# Altium PCB MainDesign.PcbDoc
Units mm, origin at the board's own origin, x right, y up, seen from the top; angles counter-clockwise.
Board outline 36.13 x 26.92 mm, 2 copper layers (Top Layer, Bottom Layer); 53 components, 45 nets, 227 pads, 84 vias.
Unrouted connection lines stored in the file: 1.
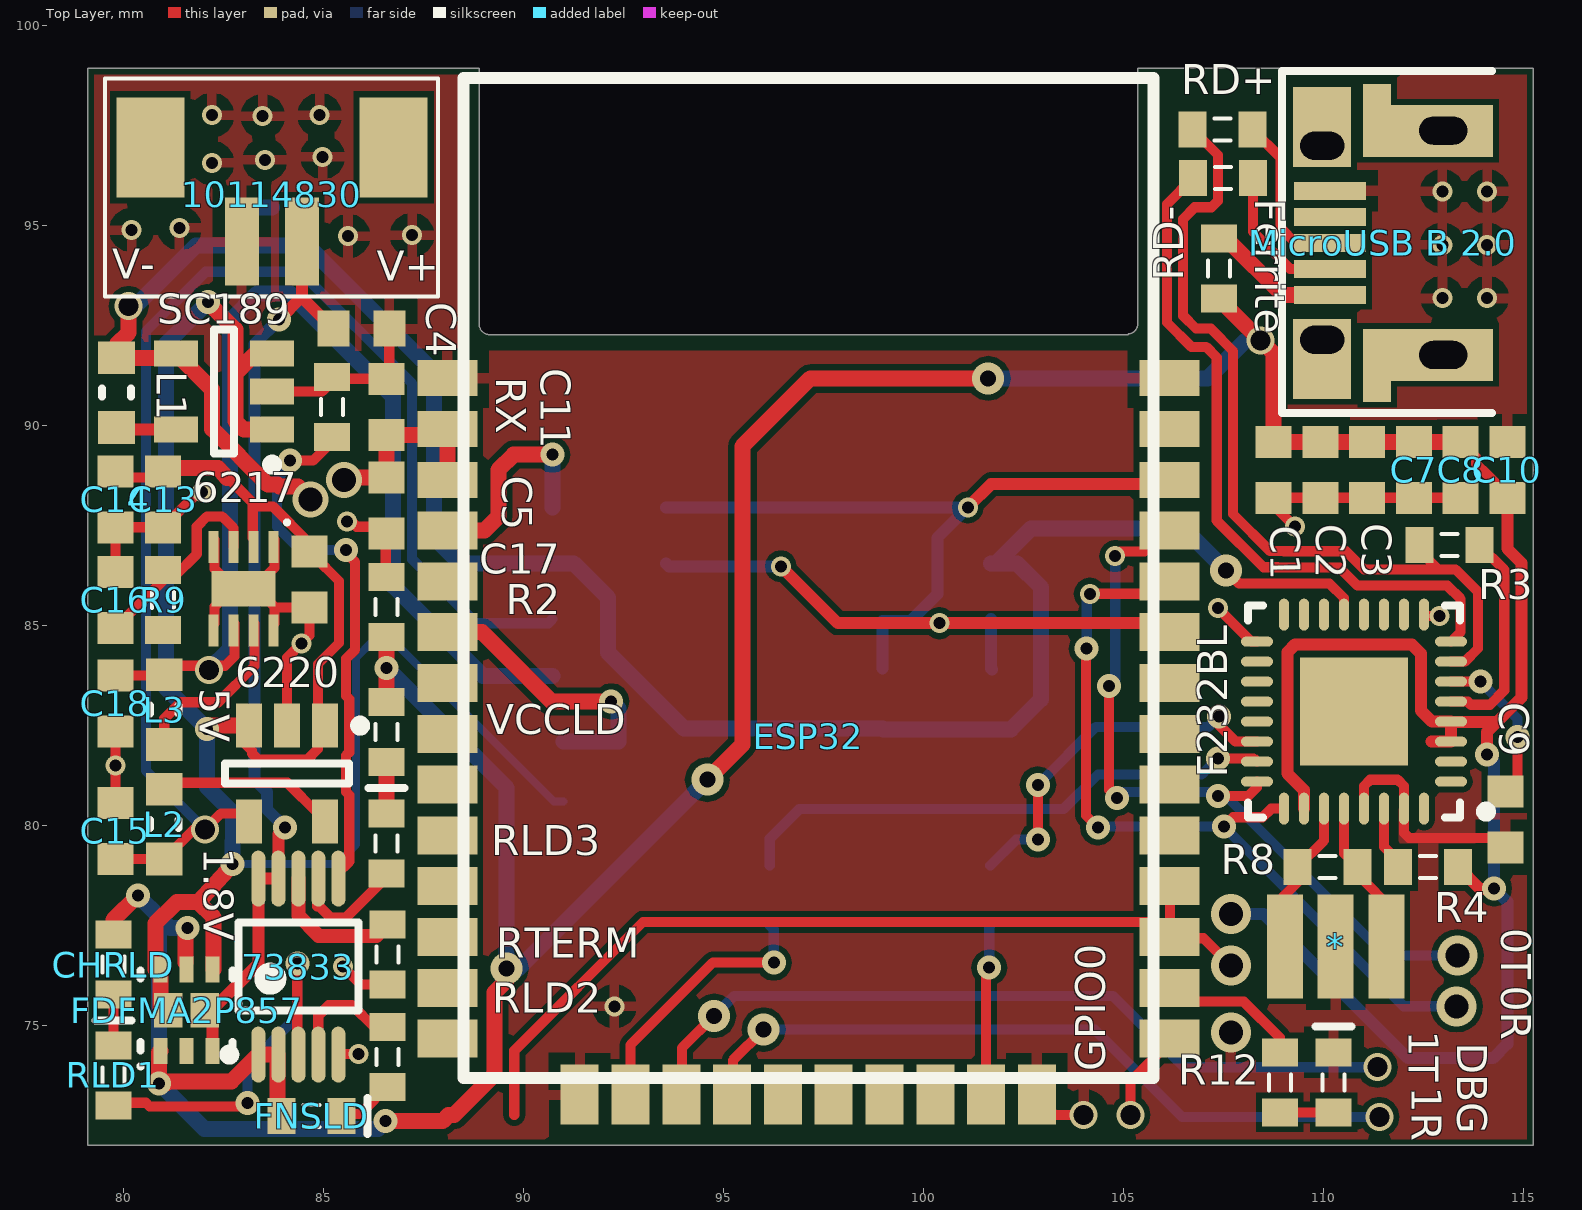
[diagram p0: Top Layer view]
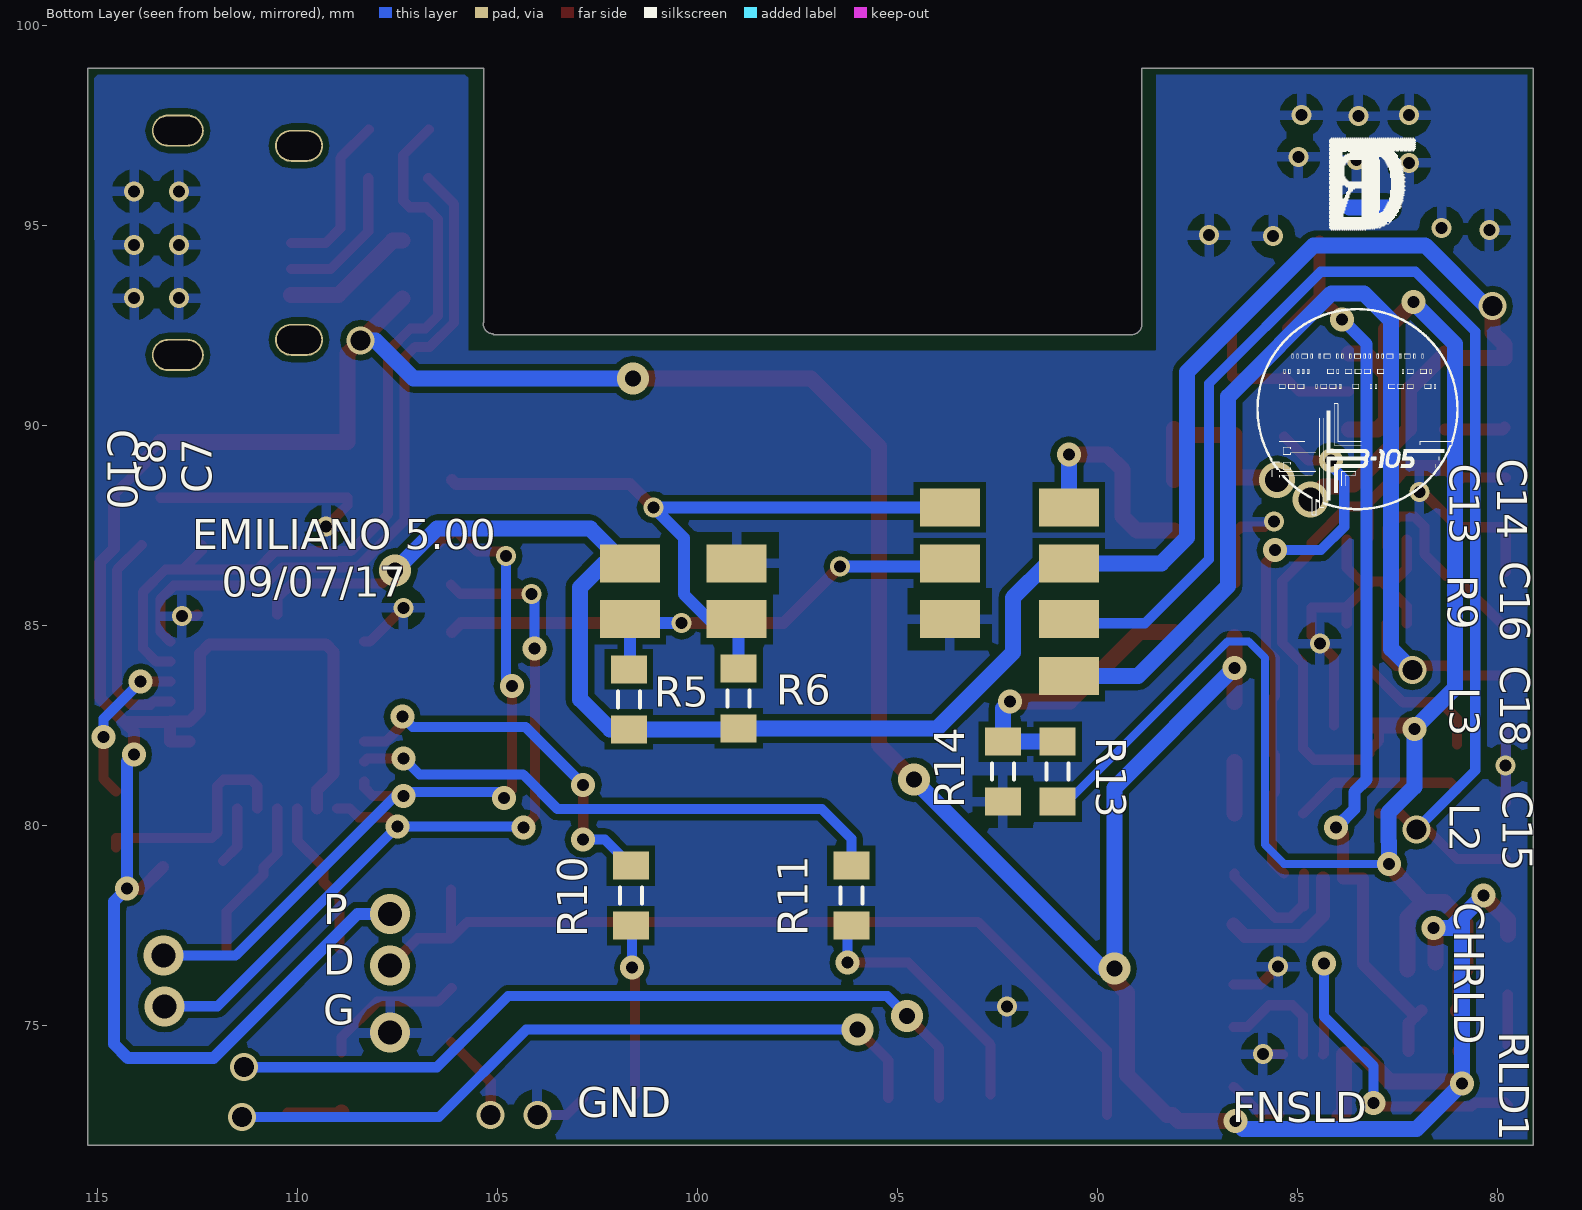
[diagram p1: Bottom Layer view, seen from below]
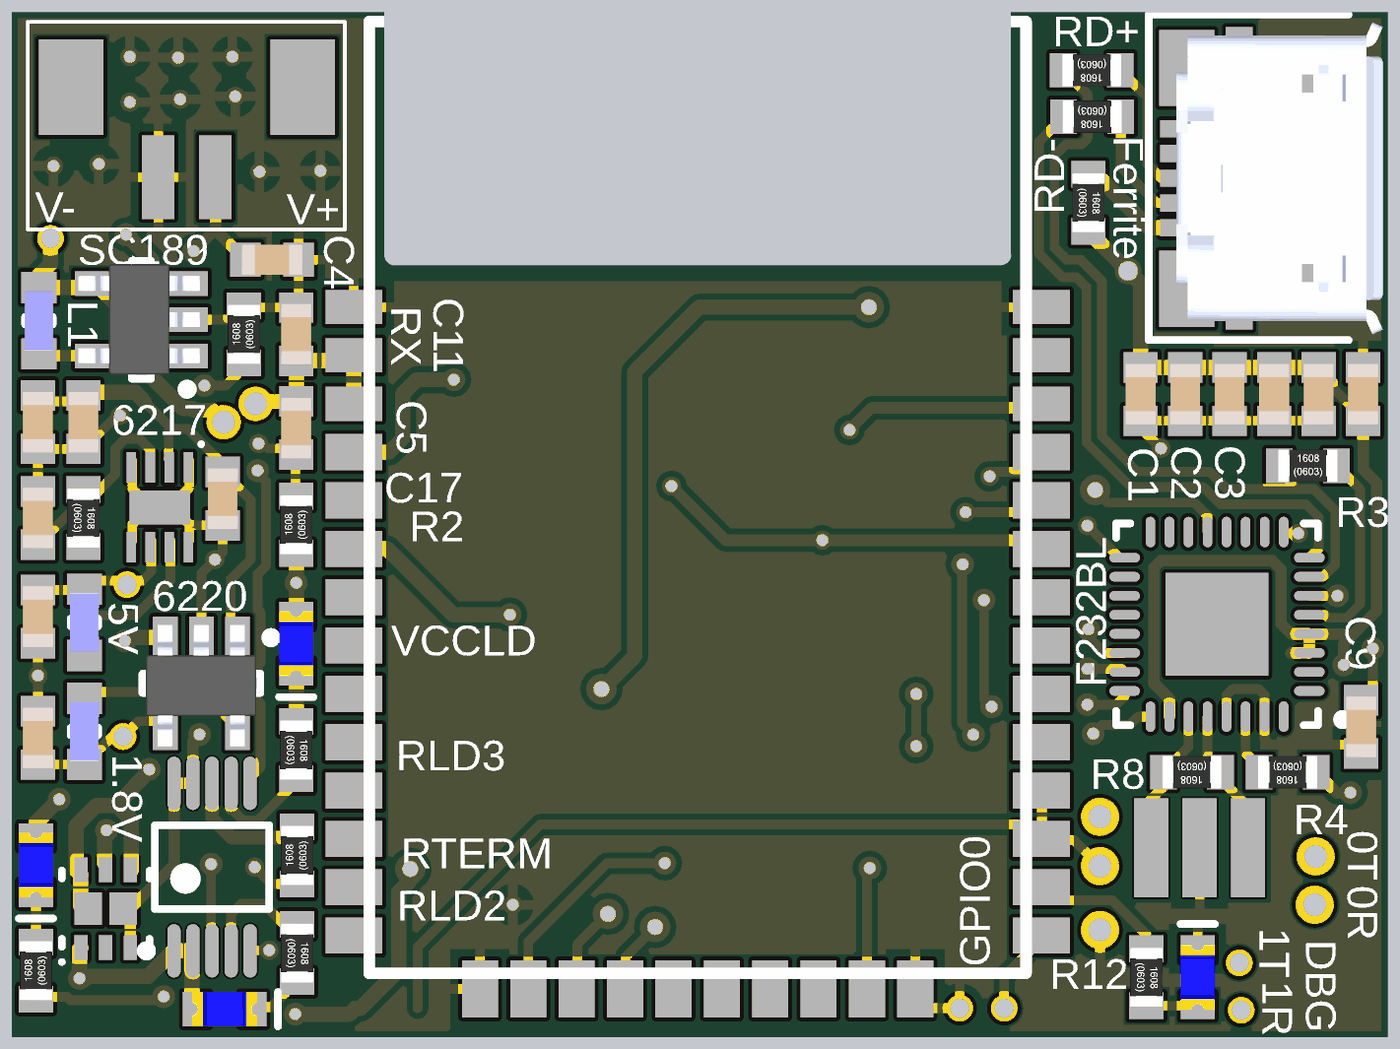
[diagram p2: 3D render of the assembled board from above, using the file's embedded part models]
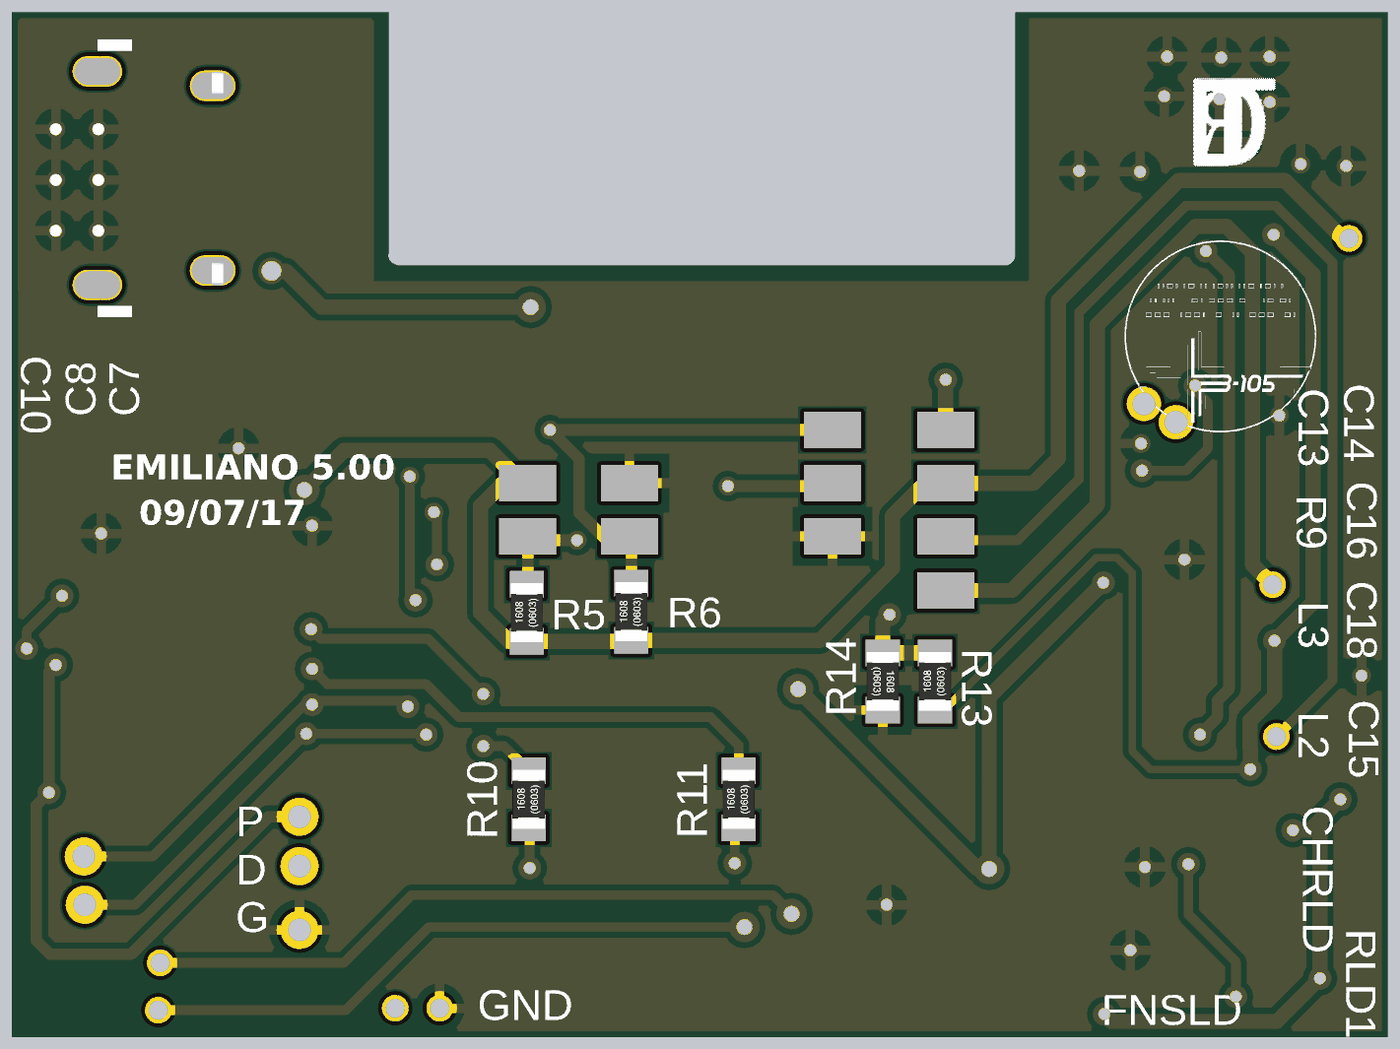
[diagram p3: 3D render of the assembled board from below, using the file's embedded part models]

## Layer stack, top to bottom
Top Solder: solder mask 0.0102, Solder Resist, Dk 3.5
Top Layer: signal copper 0.0356
Dielectric 1: dielectric 0.32, FR-4, Dk 4.8
Bottom Layer: signal copper 0.0356
Bottom Solder: solder mask 0.0102, Solder Resist, Dk 3.5

## Board outline
79.121,72.009 79.121,98.933 88.9,98.933 88.9,92.548 ccw(c89.173,92.548) 89.173,92.276 105.124,92.281 105.124,92.295 ccw(c105.105,92.558) 105.368,92.575 105.359,92.575 105.359,98.933 115.25,98.933 115.25,72.009

## Design rules (kind name [scope] priority, off if disabled: settings)
Clearance [All] p1: gap=0.15 ignorepadtopadclearanceinfootprint=FALSE except(0: Arc-Hole Track-Hole SMDPad-Hole THPad-Hole Via-Hole Fill-Hole Poly-Hole Region-Hole Text-Hole)
HoleSize [All] p1: absolutevalues=TRUE maxlimit=6.3 minlimit=0.3 maxpercent=80.000 minpercent=20.000
PolygonConnect [All] p1: connectstyle=Relief reliefconductorwidth=0.25 reliefentries=4 polygonreliefangle="90 Angle" airgapwidth=0.3
RoutingVias [All] p1: holewidth=0.3 width=0.6 viastyle="Through Hole" minholewidth=0.3 minwidth=0.6 maxholewidth=6.3 maxwidth=10.6
SilkToSilkClearance [All] p1 off: silktosilkclearance=0.254
SolderMaskExpansion [All] p1: expansion=0.102
Width Width_V+ [InNet('Net1603_1')] p1: maxlimit=0.5 minlimit=0.254 preferedwidth=0.4
Width Width_5V [InNet('Net73833_1')] p2: maxlimit=0.5 minlimit=0.254 preferedwidth=0.4
Width Width_3.3V [InNet('Net*_8')] p3: maxlimit=0.5 minlimit=0.254 preferedwidth=0.4
Width Width_1 [All] p4: maxlimit=5 minlimit=0.1 preferedwidth=0.254
28 further rules are at their usual default settings.

## Components (designator, comment, footprint, x,y, rotation, side; value= is the part's Value field where it differs from the comment)
6217 "TPS62173DSGT" TPS62173DSGT 83.007,85.928 r270 top (schematic designator TPS62173DSGT)
6220 "TPS6220" SOT23-5 84.099,81.305 r270 top (schematic designator TPS6220)
73833 "MCP73833" MCP73833/4 84.379,76.479 r90 top
10114830 "AMPHENOL 10114830 - Conector de Cable a Placa - 1.25mm" "AMPHENOL 10114830 - Conector de cable a placa - 1.25mm" 83.718,95.783 r180 top
* "CSTCRM600G55" CSTCR6M00G55B 109.855,76.937 r0 top
C1 "Cap" "0603 Cap" 108.763,88.9 r90 top value=1n
C2 "Cap" "0603 Cap" 109.931,88.9 r90 top value=100n
C3 "Cap" "0603 Cap" 111.1,88.9 r270 top value=4.7u
C4 "Cap" "0603 Cap" 85.954,92.431 r0 top value=4.7u
C5 "Cap" "0603 Cap" 86.589,88.011 r90 top value=22u
C7 "Cap" "0603 Cap" 112.268,88.9 r270 top value=100n
C8 "Cap" "0603 Cap" 113.436,88.9 r90 top value=100n
C9 "Cap" "0603 Cap" 114.554,80.162 r90 top value=33n
C10 "Cap" "0603 Cap" 114.605,88.9 r90 top value=10u
C11 "Cap" "0603 Cap" 86.589,90.475 r270 top value=470u
C13 "Cap" "0603 Cap" 81.001,88.163 r90 top value=10u
C14 "Cap" "0603 Cap" 79.807,88.163 r90 top value=4.7u
C15 "Cap" "0603 Cap" 79.807,79.872 r270 top value=10u
C16 "Cap" "0603 Cap" 79.807,85.649 r270 top value=10n
C17 "Cap" "0603 Cap" 84.658,86.157 r270 top value=10u
C18 "Cap" "0603 Cap" 79.807,83.058 r90 top value=22u
CHRLD "LED" "0603 LED-BLUE" 79.756,76.53 r270 top
DBG "LED" "0603 LED-BLUE" 110.261,73.584 r90 top
ESP32 "ESP32" ESP32 95.105,86.189 r0 top locked
F232BL "FT232BL" FT232BQ2 110.769,82.855 r180 top
FDFMA2P857 "FDFMA2P857" FDFMA2P857 81.585,75.387 r90 top
Ferrite "Res" "0603 Res" 107.391,93.929 r270 top value=55m
FNSLD "LED" "0603 LED-BLUE" 84.709,72.746 r0 top
L1 "L1" "0603 IND" 79.832,90.83 r90 top value=1u
L2 "L2" "0603 IND" 81.026,80.042 r270 top value=10u
L3 "L3" "0603 IND" 81.026,82.906 r90 top value=2.2u
"MicroUSB B 2.0" "MicroUSB B 2.0" USB-MicroB 110.175,94.57 r90 top locked
R2 "Res" "0603 Res" 86.589,85.471 r90 top value=10K
R3 "Res" "0603 Res" 113.157,87.02 r0 top value=1.5K
R4 "Res" "0603 Res" 112.624,78.969 r180 top value=470
R5 "Res" "0603 Res" 101.727,83.16 r90 bottom value=4K7
R6 "Res" "0603 Res" 98.984,83.185 r90 bottom value=4K7
R8 "Res" "0603 Res" 110.109,78.969 r180 top value=1M
R9 "Res" "0603 Res" 81.001,85.649 r270 top value=100k
R10 "Res" "0603 Res" 101.676,78.257 r90 bottom value=0
R11 "Res" "0603 Res" 96.164,78.257 r90 bottom value=0
R12 "Res" "0603 Res" 108.915,73.584 r270 top value=1K
R13 "Res" "0603 Res" 91.008,81.356 r90 bottom value=10K
R14 "Res" "0603 Res" 92.38,81.356 r270 bottom value=4K3
RD+ "Res" "0603 Res" 107.481,97.409 r180 top value=27
RD- "Res" "0603 Res" 107.493,96.19 r180 top value=27
RLD1 "Res" "0603 Res" 79.756,73.762 r90 top value=1K
RLD2 "Res" "0603 Res" 86.614,74.219 r270 top value=1K
RLD3 "Res" "0603 Res" 86.589,79.553 r270 top value=1K
RTERM "Res" "0603 Res" 86.614,76.784 r90 top value=10K
RX "Res" "0603 Res" 85.217,90.475 r90 top value=1K
SC189 "SC189ZSKCT" SOT23-5 82.525,90.856 r180 top (schematic designator SC189ZSKCT)
VCCLD "LED" "0603 LED-BLUE" 86.589,82.347 r270 top

## Footprints (in the part's own frame and the unit in brackets; to place one, negate y for a bottom-side part, rotate by r counter-clockwise, add the part's x,y. Pads: shape width x height; smd on the part's side, far side on the other; paste and mask are expansions set on the pad)
"0603 Cap" [mm] "Chip Capacitor, Body 1.6x0.8mm, IPC High Density"
  rect 0.8x0.9 smd: 1(-0.7,0) 2(0.7,0)
  body extent -0.8,-0.4 0.8,0.4, height 0.78
"0603 IND" [mm] "Chip Inductor, 2-Leads, Body 1,60x0,80mm, IPC Medium Density"
  rect 0.82x0.92 smd: 1(-0.87,0) 2(0.87,0)
  silkscreen extent -0.1,-0.36 0.1,0.36, body extent -0.77,-0.38 0.77,0.38, height 0.52
"0603 LED-BLUE" [mm] "LED, Body 1.6x0.8mm, IPC High Density"
  rect 0.7x0.9 smd: 1(-0.75,0) 2(0.75,0)
  silkscreen extent -0.2,-0.45 1.4,0.45, body extent -0.85,-0.45 0.85,0.45, height 0.9
"0603 Res" [mm] "Chip Resistor, Body 1.6x0.8mm, IPC High Density"
  rect 0.7x0.9 smd: 1(-0.75,0) 2(0.75,0)
  silkscreen extent -0.2,-0.28 0.2,0.28, body extent -0.78,-0.43 0.78,0.43, height 0.44
"AMPHENOL 10114830 - Conector de cable a placa - 1.25mm" [mm]
  rect 1.7x2.5 smd: 0(-3.041,-1.18) 0(3.041,-1.18)
  rect 0.85x2.2 smd: 1(-0.748,1.18) 2(0.752,1.18)
  silkscreen extent -4.15,-2.89 4.18,2.56
CSTCR6M00G55B [mm]
  rect 0.9x2.6 smd mask+0.05: 1(-0.813,0.051) 2(0.457,0.051) 3(1.727,0.051)
  body extent -1.14,-0.6 2.06,0.7, height 0.7
ESP32 [mm]
  rect 1.5x0.9 smd: 1(-7,5) 2(-7,3.73) 3(-7,2.46) 36(11.05,2.46) 37(11.05,3.73) 38(11.05,5)
  rect 1.5x0.95 smd: 4(-7,1.19) 5(-7,-0.08) 6(-7,-1.35) 7(-7,-2.62) 8(-7,-3.89) 9(-7,-5.16) 10(-7,-6.43) 11(-7,-7.7) 12(-7,-8.97) 13(-7,-10.24) 14(-7,-11.51) 25(11.05,-11.51) 26(11.05,-10.24) 27(11.05,-8.97) 28(11.05,-7.7) 29(11.05,-6.43) 30(11.05,-5.16) 31(11.05,-3.89) 32(11.05,-2.62) 33(11.05,-1.35) 34(11.05,-0.08) 35(11.05,1.19)
  rect 0.95x1.5 smd: 15(-3.69,-12.91) 16(-2.42,-12.91) 17(-1.15,-12.91) 18(0.12,-12.91) 19(1.39,-12.91) 20(2.66,-12.91) 21(3.93,-12.91) 22(5.2,-12.91) 23(6.47,-12.91) 24(7.74,-12.91)
  silkscreen extent -6.6,-12.5 10.65,12.5, body extent -6.63,-12.5 10.68,12.55, height 2
FDFMA2P857 [mm] "SON, 6-Leads, Body 2,00x2,00mm, Pitch 0,65mm, Thermal Pad 1,64x0,86mm, IPC Medium Density"
  rect 0.65x0.35 smd: 1(-1.02,0.65) 2(-1.02,0) 3(-1.02,-0.65) 4(1.02,-0.65) 5(1.02,0) 6(1.02,0.65)
  rect 0.86x0.72 smd: 7(0,0.457) 8(0,-0.457)
  silkscreen extent -1.45,-1.15 1,1.2, body extent -1,-1 1,1, height 0.8
FT232BQ2 [mm]
  oval 0.8x0.25 smd: 1(-2.425,1.75) 2(-2.425,1.25) 3(-2.425,0.75) 4(-2.425,0.25) 5(-2.425,-0.25) 6(-2.425,-0.75) 7(-2.425,-1.25) 8(-2.425,-1.75) 17(2.425,-1.75) 18(2.425,-1.25) 19(2.425,-0.75) 20(2.425,-0.25) 21(2.425,0.25) 22(2.425,0.75) 23(2.425,1.25) 24(2.425,1.75)
  oval 0.25x0.8 smd: 9(-1.75,-2.425) 10(-1.25,-2.425) 11(-0.75,-2.425) 12(-0.25,-2.425) 13(0.25,-2.425) 14(0.75,-2.425) 15(1.25,-2.425) 16(1.75,-2.425) 25(1.75,2.425) 26(1.25,2.425) 27(0.75,2.425) 28(0.25,2.425) 29(-0.25,2.425) 30(-0.75,2.425) 31(-1.25,2.425) 32(-1.75,2.425)
  rect 2.7x2.7 smd: 33(0,0)
  silkscreen extent -3.42,-2.65 2.65,2.65, body extent -2.5,-2.5 2.5,2.5, height 0.75
MCP73833/4 [mm] "Stand-Alone Linear Li-Ion / Li-Polymer Charge  Management Controller"
  oval 1.4x0.35 smd mask+0.05: 1(-2.2,1) 2(-2.2,0.5) 3(-2.2,0) 4(-2.2,-0.5) 5(-2.2,-1) 6(2.2,-1) 7(2.2,-0.5) 8(2.2,0) 9(2.2,0.5) 10(2.2,1)
  silkscreen extent -2.32,-1.5 1.1,1.85, body extent -1.5,-1.5 1.5,1.5, height 1.1
SOT23-5 [mm] "SOT23, 5-Leads, Body 2.9x1.6mm, Pitch 0.95mm, Lead Span 2.8mm, IPC Medium Density"
  rect 1.1x0.65 smd: 1(-1.2,0.95) 2(-1.2,0) 3(-1.2,-0.95) 4(1.2,-0.95) 5(1.2,0.95)
  silkscreen extent -1.32,-1.55 0.25,1.95, body extent -1.54,-1.46 1.66,1.44, height 0.94
TPS62173DSGT [mm]
  rect 0.8x0.25 smd: 1(-1.045,0.75) 2(-1.045,0.25) 3(-1.045,-0.25) 4(-1.045,-0.75) 5(1.045,-0.75) 6(1.045,-0.25) 7(1.045,0.25) 8(1.045,0.75)
  rect 0.89x1.6 smd: 9(0,0)
  silkscreen extent -1.71,1.04 -1.61,1.14, body extent -0.95,-0.95 0.95,0.95, height 0.8
USB-MicroB [mm]
  rect 0.45x1.8 smd: 1(-1.3,0) 2(-0.65,0) 3(0,0) 4(0.65,0) 5(1.3,0)
  rect 0.55x0.7 smd: 6(-3.7,-1.175) 6(3.7,-1.175)
  rect 2x1.45 smd: 6(-2.9,0.2) 6(2.9,0.2)
  oval 0.8x1.3 hole 0.7 slot 1.2 at 90 deg: 6(-2.8,-2.83) 6(2.81,-2.83)
  rect 1.3x3.25 smd: 6(-2.8,-2.45) 6(2.8,-2.45)
  oval 0.8x1.2 hole 0.7 slot 1.1 at 90 deg: 6(-2.42,0.2) 6(2.43,0.2)
  silkscreen extent -4.25,-4.05 4.3,1.2, body extent -4.1,-4.95 4.1,0.48, height 2.68

## Part data
73833: Supplier Part Number 1=MCP73833T-AMI/UNCT-ND, Supplier 1=Digi-Key
10114830: Supplier Part Number 1=2100756, Supplier 1=Farnell
*: Supplier Part Number 1=490-5997-2-ND, Supplier 1=Digi-Key
F232BL: Supplier Part Number 1=9519769, Supplier 1=Farnell
FDFMA2P857: Supplier Part Number 1=FDFMA2P857CT-ND, Supplier 1=Digi-Key
L1 L2 L3: library part Ind
SC189: library part MCP1603T-330I/OS, "500mA Synchronous Buck Regulator, 3.3V, 2.0 MHz, 5-Pin TSOT, Industrial Temperature, Tape and Reel", ComponentLink1Description="Manufacturer Link", ComponentLink1URL=http://www.microchip.com, ComponentLink2Description=Datasheet, ComponentLink2URL=http://ww1.microchip.com/downloads/en/DeviceDoc/22042a.pdf, ComponentLink3Description="Packaging Specification", ComponentLink3URL=http://ww1.microchip.com/downloads/en/PackagingSpec/00049AW.pdf, DatasheetVersion="revA, May-2007", PackageDescription="5-Lead Plastic Small Outline Transistor (OS) [TSOT]", PackageReference=TSOT-OS5, PackageVersion="revAW, Oct-2008", Published=29-Jan-2009, Publisher="Altium Limited"
6217 6220: ComponentLink1Description="Manufacturer Link", ComponentLink1URL=http://www.microchip.com, ComponentLink2Description=Datasheet, ComponentLink2URL=http://ww1.microchip.com/downloads/en/DeviceDoc/22042a.pdf, ComponentLink3Description="Packaging Specification", ComponentLink3URL=http://ww1.microchip.com/downloads/en/PackagingSpec/00049AW.pdf, DatasheetVersion="revA, May-2007", PackageDescription="5-Lead Plastic Small Outline Transistor (OS) [TSOT]", PackageReference=TSOT-OS5, PackageVersion="revAW, Oct-2008", Published=29-Jan-2009, Publisher="Altium Limited"

## Free pads (board coordinates)
  rect 1.5x0.95 smd far side: 2(90.729,83.744) 2(90.729,85.166) 2(90.729,86.563) 2(90.729,87.96) 2(93.701,85.166) 2(93.701,86.563) 2(93.701,87.96) 2(99.035,85.166) 2(99.035,86.563) 2(101.702,85.166) 2(101.702,86.563)

## Via types
v1: diameter 0.6, hole 0.3, Top Layer to Bottom Layer, tented both sides, 32 vias
v2: diameter 0.5, hole 0.3, Top Layer to Bottom Layer, tented both sides, 31 vias
v3: diameter 0.7, hole 0.5, Top Layer to Bottom Layer, 7 vias
v4: diameter 0.8, hole 0.4, Top Layer to Bottom Layer, tented both sides, 6 vias
v5: diameter 1, hole 0.6, Top Layer to Bottom Layer, 5 vias
v6: diameter 0.9, hole 0.6, Top Layer to Bottom Layer, 2 vias
v7: diameter 0.7, hole 0.5, Top Layer to Bottom Layer, tented both sides, 1 vias

## Nets (pads, with @x,y where several pads share a name; then routed paths per layer and width w, separated by ;. In a path a pad name is that pad's centre, name@x,y a point inside that pad or via, vN(x,y) a via of type N, cw(c..) or ccw(c..) an arc to the next point about the centre after c; other vN are vias at no path point)
GND: 6217.1 6217.4 6217.5 6217.8 6217.9 6220.2 73833.5 10114830.2 "MicroUSB B 2.0.5" *.2 C1.1 C2.1 C3.2 C4.2 C5.1 C7.2 C8.1 C9.1 C10.2 C11.1 C13.1 C14.1 C15.1 C16.1 C17.2 C18.1 DBG.2 ESP32.1 ESP32.15 ESP32.24 ESP32.38 F232BL.9 F232BL.17 F232BL.29 F232BL.31 pad.2@93.701,85.166 pad.2@99.035,86.563 R2.2 R14.2 RTERM.1 RX.2 SC189.2 | length 38.2
  Top Layer w0.254: C15.1 v2(79.807,81.509) C18.1 ; C16.1 C14.1 C13.1 81.878,88.341 v2(81.966,88.341) ; 6217.5@82.283,85.061 82.283,85.478 6217.9@82.911,86.106 ; 6217.4@82.283,87.151 82.283,86.424 82.601,86.106 6217.9@82.911,86.106 ; SC189.2 84.975,90.856 85.344,91.225 85.394,91.175 C11.1 86.654,91.24 C4.2 ; 6217.8@83.783,85.061 83.783,85.478 ; 6217.1@83.783,87.151 83.783,86.45 83.439,86.106 6217.9@83.154,86.106 ; 6220.2 84.099,84.201 v2(84.455,84.557) 84.658,84.76 C17.2 83.804,85.457 83.783,85.478 ; 73833.5 85.394,74.295 v2(85.877,74.295) ; v2(85.496,76.479) 85.942,76.034 RTERM.1 ; v2(85.598,87.605) 85.598,87.72 85.841,87.478 86.422,87.478 C5.1 ; R2.2@86.563,86.069 C5.1@86.563,87.184 ; ESP32.24@102.863,73.196 103.288,72.771 v3(104.013,72.771) ; v2(107.366,85.446) 108.207,84.605 F232BL.17 ; v2(109.296,87.478) 108.763,88.011 C1.1 C2.1 C3.2 C7.2 C8.1 ; F232BL.29 111.019,80.997 111.176,81.153 111.862,81.153 112.019,80.995 F232BL.31 112.019,79.827 112.151,79.696 114.554,79.696 C9.1 ; F232BL.9 112.557,85.242 v2(112.903,85.242) ; 6217.9@82.911,86.106 6217.9@83.154,86.106 ; 6217.9@83.154,86.106 83.783,85.478
  other v2: 92.278,75.489 112.979,93.193 114.097,93.193 112.979,94.526 114.097,94.526 85.623,94.742 87.224,94.767 80.213,94.894 81.407,94.945 112.979,95.86 114.097,95.86 82.22,96.571 83.541,96.647 84.988,96.723 83.49,97.739 82.22,97.765 84.912,97.765
  other v5: 107.696,74.828
INT_MAX30105: ESP32.4 pad.2@90.729,87.96 | length 5.4
  Top Layer w0.4: ESP32.4 89.03,87.379 89.383,87.732 89.383,88.9 89.764,89.281 v1(90.729,89.281)
  Bottom Layer w0.4: pad.2@90.729,87.96 v1(90.729,89.281)
Net73833_1: 73833.1 73833.2 C1.2 C2.2 C3.1 C7.1 C8.2 C10.1 CHRLD.1 F232BL.3 F232BL.4 F232BL.26 FDFMA2P857.1 FDFMA2P857.5 Ferrite.2 FNSLD.1 R2.1 R4.1 VCCLD.1 | length 112.7
  Top Layer w0.254: C8.2 113.817,89.219 113.817,89.052 113.993,88.877 114.001,88.877 114.605,88.273 C10.1
  Top Layer w0.3: F232BL.26 109.519,80.894 109.108,81.305 109.108,84.343 109.296,84.531 112.217,84.531 112.446,84.303 112.446,82.88 112.721,82.605 F232BL.4 113.198,82.601 114.351,82.601 ; 112.712,82.105 F232BL.3 113.194,82.58 F232BL.4@113.292,82.58 ; R4.1 113.919,78.423 v1@114.275,78.423 ; v1(114.097,81.788) 114.097,82.347 114.351,82.601 ; C10.1 114.605,86.926 114.956,86.576 114.956,83.206 114.351,82.601 ; v1@114.275,78.423 114.263,78.435 v1(114.275,78.435) v1@114.275,78.423
  Top Layer w0.4: CHRLD.1 79.756,77.648 v1(80.366,78.257) ; FDFMA2P857.1 80.899,74.331 v1(80.899,73.558) 81.077,73.558 81.128,73.609 82.709,73.609 73833.1 83.854,74.279 83.854,72.851 FNSLD.1 ; FDFMA2P857.5@81.558,76.583 81.558,77.251 81.61,77.303 v1(81.61,77.445) ; v1(86.563,72.619) 87.986,72.619 88.138,72.771 88.277,72.771 89.281,73.775 89.281,75.831 89.586,76.136 v4(89.586,76.429) ; VCCLD.1 v1(86.589,83.947) R2.1 ; v4(94.603,81.153) 95.479,82.029 95.479,89.484 97.18,91.186 v4(101.625,91.186) ; Ferrite.2 v7(108.433,92.138) 108.763,91.808 C1.2 C2.2 C3.1 C7.1 C8.2
  Bottom Layer w0.3: v5(107.696,77.8) 108.509,77.8 112.116,74.193 114.249,74.193 114.605,74.549 114.605,78.105 v1(114.275,78.435) 114.275,81.61 v1(114.097,81.788)
  Bottom Layer w0.4: v1(80.366,78.257) 80.924,77.699 ; v1(81.61,77.445) 81.178,77.445 80.924,77.699 ; v1(86.563,72.619) 86.37,72.426 82.032,72.426 v1(80.899,73.558) 80.899,77.673 80.924,77.699 ; v1(86.589,83.947) 89.586,80.95 v4(89.586,76.429) 89.879,76.429 v4(94.603,81.153) ; v4(101.625,91.186) 107.114,91.186 108.066,92.138 v7(108.433,92.138)
Net73833_3: 73833.3 RLD1.1 | length 9.7
  Top Layer w0.254: RLD1.1 79.82,73.076 80.566,73.076 80.66,72.981 83.014,72.981 v1(83.109,73.076) ; v1(84.353,76.556) 84.353,74.305 73833.3
  Bottom Layer w0.254: v1(83.109,73.076) 83.109,73.99 84.353,75.235 v1(84.353,76.556)
Net73833_4: 73833.4 RLD2.1 | length 3
  Top Layer w0.254: 73833.4 84.879,75.252 85.141,75.514 85.725,75.514 86.27,74.969 RLD2.1
Net73833_6: 73833.6 RX.1 | length 13.8
  Top Layer w0.254: v1(84.176,89.129) 84.743,89.129 84.746,89.131 84.748,89.129 RX.1@85.344,89.725 ; 73833.6@85.353,78.806 85.651,79.104 85.651,80.77 85.573,80.849 85.573,81.762 85.651,81.841 85.651,83.17 85.573,83.249 85.573,84.176 85.799,84.402 85.799,86.596 v1@85.573,86.822
  Bottom Layer w0.254: v1(84.176,89.129) v1@84.298,89.129 ; v1@84.3,89.131 v1@84.298,89.129 ; v1(85.573,86.893) 84.43,86.893 83.845,87.478 83.845,88.676 v1@84.298,89.129
Net73833_7: 73833.7 RLD3.2 | length 3.8
  Top Layer w0.254: 73833.7@84.853,77.986 73833.7@84.853,78.806 ; 73833.7 84.879,78.015 85.192,77.702 85.566,77.702 86.589,78.725 RLD3.2
Net73833_8: 73833.8 RTERM.2 | length 3.5
  Top Layer w0.35: 73833.8 84.379,77.761 84.889,77.25 86.33,77.25 RTERM.2
Net73833_9: 73833.9 73833.10 10114830.1 C4.1 FDFMA2P857.3 FDFMA2P857.8 | length 23.6
  Top Layer w0.3: FDFMA2P857.8@81.915,75.387 FDFMA2P857.8@82.067,75.235 ; FDFMA2P857.3 82.235,75.067 FDFMA2P857.8@82.067,75.235 ; v1(83.896,92.659) 84.466,93.229 ; v1(84.049,79.959) 83.879,79.789 73833.9 73833.10 83.379,76.546 FDFMA2P857.8@82.067,75.235 ; 10114830.1 84.466,93.229 ; C4.1 84.466,93.218 84.466,93.229
  Bottom Layer w0.3: v1(83.896,92.659) 83.287,92.05 83.287,81.154 83.592,80.848 83.592,80.415 v1(84.049,79.959)
NetC5_2: C5.2 C11.2 ESP32.2 ESP32.3 F232BL.13 L1.2 pad.2@90.729,86.563 pad.2@101.702,86.563 R5.1 R6.1 SC189.4 | length 60
  Top Layer w0.254: v4(107.569,86.385) 107.899,86.055 110.16,86.055 110.519,85.696 F232BL.13
  Top Layer w0.4: v3(80.137,92.989) 80.137,92.329 79.832,92.024 L1.2 81.219,91.7 SC189.4 82.225,90.906 82.225,89.921 83.617,88.529 83.856,88.529 83.906,88.479 84.368,88.479 v6(84.684,88.163) ; v6@85.373,88.711 C5.2 C11.2 87.96,89.775 ESP32.2 ESP32.3
  Bottom Layer w0.4: v3(80.137,92.989) 80.3,92.989 81.824,94.513 84.607,94.513 87.77,91.351 87.77,87.211 88.417,86.563 90.729,86.563 91.262,86.563 92.126,85.7 92.126,84.328 94.019,82.435 R6.1 99.009,82.41 R5.1 102.196,82.41 102.946,83.16 102.946,85.962 102.345,86.563 pad.2@101.829,86.563 ; pad.2@101.702,86.563 pad.2@101.829,86.563 ; v4(107.569,86.385) 106.528,87.427 102.692,87.427 pad.2@101.829,86.563
  other v6: 85.522,88.646
NetC9_2: C9.2 F232BL.6 | length 4
  Top Layer w0.254: F232BL.6 v1(113.932,83.605) ; C9.2 114.859,81.167 v1(114.859,82.22)
  Bottom Layer w0.254: v1(113.932,83.605) 114.859,82.678 v1(114.859,82.22)
NetC13_2: 6217.2 6220.1 6220.3 C13.2 C14.2 C17.1 FDFMA2P857.4 FDFMA2P857.6 FDFMA2P857.7 R13.1 SC189.1 SC189.3 | length 58
  Top Layer w0.254: C14.2@79.807,88.711 C13.2@81.001,88.711 ; 82.601,88.697 82.601,88.712 83.327,87.986 83.744,87.986 84.658,87.071 C17.1 ; 6220.3@82.972,82.505 82.972,82.128 83.218,81.882 83.218,81.815 83.38,81.653 84.599,81.653 84.872,81.925 84.872,84.046 85.395,84.569 85.395,86.12 C17.1@84.778,86.737 ; 6217.2@83.242,87.192 83.242,88.042
  Top Layer w0.4: FDFMA2P857.7@81.001,75.387 80.931,75.457 80.931,76.284 80.808,76.407 80.808,77.561 81.341,78.095 81.879,78.095 ; C13.2@81.001,88.711 81.24,88.951 82.372,88.951 82.601,88.697 ; v1(82.093,82.423) 82.175,82.505 82.972,82.505 6220.3 ; v1(82.118,93.091) 82.804,92.405 82.804,91.305 ; FDFMA2P857.4@82.26,76.407 82.26,77.714 81.879,78.095 ; v1(82.728,79.045) 82.728,79.019 81.879,78.095 ; SC189.1 83.017,89.906 82.804,90.119 82.804,91.305 ; SC189.3 83.305,91.806 82.804,91.305
  Bottom Layer w0.2: v1(82.728,79.045) 85.344,79.045 85.827,79.527 85.827,84.201 86.233,84.607 86.765,84.607 90.766,80.606 R13.1
  Bottom Layer w0.4: v1(82.118,93.091) 81.077,92.05 81.077,83.439 v1(82.093,82.423) 82.093,80.975 82.742,80.326 82.742,79.618 82.728,79.604 v1(82.728,79.045)
NetC15_2: 6220.4 C15.2 L2.2 pad.2@90.729,85.166 | length 33.7
  Top Layer w0.254: C15.2 L2.2 81.763,79.908 v3(82.042,79.908) 82.442,80.309 6220.4@82.972,80.309
  Bottom Layer w0.254: v3(82.042,79.908) 80.569,81.382 80.569,92.358 82.064,93.853 84.43,93.853 87.224,91.059 87.224,86.665 88.824,85.065 90.627,85.065 pad.2@90.729,85.166
NetC16_2: 6217.3 C16.2 R9.1 | length 5.3
  Top Layer w0.254: C16.2 81.001,86.143 R9.1 ; R9.1@81.026,86.247 81.294,86.247 81.839,86.792 81.839,87.478 82.093,87.732 82.474,87.732 82.757,87.448 6217.3
NetC18_2: 6217.6 C18.2 L3.2 pad.2@90.729,83.744 | length 28
  Top Layer w0.254: C18.2 81.008,83.758 L3.2 81.251,84.001 82.547,84.001 82.783,84.237 6217.6@82.783,85.061
  Bottom Layer w0.4: v3(82.144,83.896) 82.671,84.423 82.671,92.627 83.352,93.309 84.165,93.309 86.747,90.728 86.747,85.999 89.002,83.744 pad.2@90.729,83.744
NetCHRLD_2: CHRLD.2 RLD1.2 | length 1.3
  Top Layer w0.254: RLD1.2 CHRLD.2
NetDBG_1: DBG.1 R12.2 | length 1.3
  Top Layer w0.254: R12.2 DBG.1
NetESP32_6: ESP32.6 R13.2 R14.1 | length 7.3
  Top Layer w0.4: ESP32.6 88.973,84.839 90.703,83.109 v1(92.202,83.109)
  Bottom Layer w0.4: R13.2 R14.1 92.38,82.931 v1(92.202,83.109)
NetESP32_16: ESP32.16 R11.1 | length 6.6
  Top Layer w0.254: ESP32.16 92.685,74.524 94.742,76.581 v1(96.266,76.581)
  Bottom Layer w0.254: R11.1 96.266,77.406 v1(96.266,76.581)
NetESP32_17: ESP32.17 | length 19.9
  Top Layer w0.254: ESP32.17@93.973,73.196 93.973,74.448 v4(94.775,75.25)
  Bottom Layer w0.254: v4(94.775,75.25) 95.268,75.743 104.75,75.743 106.528,73.965 v3(111.354,73.965)
NetESP32_18: ESP32.18 | length 18.3
  Top Layer w0.254: ESP32.18@95.243,73.196 95.243,74.136 v4(96.012,74.905)
  Bottom Layer w0.254: v4(96.012,74.905) 104.292,74.905 106.477,72.72 v3(111.404,72.72)
NetESP32_23: ESP32.23 R10.1 | length 4.3
  Top Layer w0.254: ESP32.23 101.575,76.378 v1(101.651,76.454)
  Bottom Layer w0.254: v1(101.651,76.454) 101.651,77.482 R10.1
NetESP32_25: ESP32.25 | length 2.2
  Top Layer w0.254: v3(105.181,72.771) 105.181,73.604 ESP32.25@106.173,74.596
NetESP32_26: ESP32.26 R12.1 | length 3.6
  Top Layer w0.254: ESP32.26 106.498,75.605 108.018,75.605 108.915,74.708 R12.1
NetESP32_34: ESP32.34 F232BL.25 | length 20.6
  Top Layer w0.254: v1(104.089,84.43) 104.071,84.411 104.071,80.257 v1(104.369,79.959) ; v2(104.165,85.801) 105.948,85.801 ESP32.34@106.173,86.026 ; v1(107.518,79.985) 107.747,80.213 108.483,80.213 108.7,80.43 F232BL.25
  Bottom Layer w0.254: v1(104.089,84.43) 104.089,85.725 v2(104.165,85.801) ; v1(104.369,79.959) 104.394,79.985 v1(107.518,79.985) 112.014,75.489 v5(113.335,75.489)
NetESP32_35: ESP32.35 F232BL.24 | length 19.7
  Top Layer w0.254: v1(104.648,83.49) 104.648,80.899 v1(104.851,80.696) ; v2(104.8,86.741) 104.92,86.861 105.527,86.861 106.068,87.401 ESP32.35@106.173,87.296 ; ESP32.35 ESP32.35@106.488,87.046 ; v1(107.366,80.747) 108.128,80.747 108.344,80.963 F232BL.24
  Bottom Layer w0.254: v1(104.648,83.49) 104.8,83.642 v2(104.8,86.741) v2@104.766,86.741 ; v1(104.851,80.696) 104.851,80.797 104.902,80.848 v1@107.213,80.848 ; v1(107.366,80.747) 107.572,80.747 111.56,76.759 v5(113.36,76.759)
NetF232BL_5: F232BL.5 R3.2 | length 5.4
  Top Layer w0.254: F232BL.5 113.616,83.105 113.693,83.028 114.171,83.028 114.529,83.385 114.529,86.399 R3.2
NetF232BL_7: F232BL.7 R3.1 RD+.2 | length 21.2
  Top Layer w0.254: RD+.2 107.37,96.77 107.37,95.625 107.208,95.463 106.791,95.463 106.5,95.171 106.5,92.75 106.82,92.431 107.188,92.431 107.747,91.872 107.747,87.795 108.675,86.866 109.025,86.866 109.028,86.863 110.571,86.863 111.025,86.408 112.88,86.408 ; R3.1 112.407,86.881 112.88,86.408 ; F232BL.7 113.543,84.105 113.871,84.433 113.871,85.849 113.312,86.408 112.88,86.408
NetF232BL_8: F232BL.8 RD-.2 | length 17.6
  Top Layer w0.254: RD-.2 106.096,95.543 106.096,92.583 106.705,91.973 107.074,91.973 107.34,91.707 107.34,87.63 108.508,86.462 108.857,86.462 108.86,86.459 110.403,86.459 110.858,86.004 113.106,86.004 113.436,85.674 113.436,84.847 F232BL.8
NetF232BL_22: F232BL.22 R10.2 | length 9.4
  Top Layer w0.254: v1(102.87,79.654) v1(102.87,81.026) ; v1(107.391,82.728) 107.391,82.525 107.811,82.105 F232BL.22
  Bottom Layer w0.254: R10.2 102.323,79.654 v1(102.87,79.654) v1@102.845,79.629 ; v1(102.87,81.026) 104.318,82.474 107.137,82.474 v1(107.391,82.728)
NetF232BL_23: F232BL.23 R11.2 | length 13.7
  Top Layer w0.254: v1(107.366,81.686) 108.263,81.686 F232BL.23
  Bottom Layer w0.254: R11.2 96.164,79.68 96.901,80.416 103.505,80.416 104.371,81.282 106.962,81.282 v1(107.366,81.686)
NetF232BL_27: *.1 F232BL.27 R8.2 | length 3.9
  Top Layer w0.254: *.1@108.966,76.937 108.966,78.195 109.359,78.588 R8.2 110.019,79.629 F232BL.27
NetF232BL_28: *.3 F232BL.28 R8.1 | length 4
  Top Layer w0.254: F232BL.28 110.519,79.308 R8.1 110.859,78.786 111.785,77.859 *.3@111.785,76.937
NetF232BL_30: F232BL.30 R4.2 | length 1.5
  Top Layer w0.254: F232BL.30 111.519,79.475 R4.2@111.874,79.121
NetFerrite_1: "MicroUSB B 2.0.1" Ferrite.1 | length 3.3
  Top Layer w0.4: Ferrite.1@107.391,94.628 107.632,94.628 108.99,93.27 110.175,93.27
NetFNSLD_2: FNSLD.2 RLD2.2 | length 1.4
  Top Layer w0.254: FNSLD.2@85.459,72.796 85.942,72.796 85.986,72.841 85.986,72.858 86.597,73.469 RLD2.2
NetL1_1: L1.1 SC189.5 | length 1.5
  Top Layer w0.3: L1.1 79.887,89.906 SC189.5
NetL2_1: 6220.5 L2.1 | length 4.2
  Top Layer w0.254: L2.1 81.191,81.077 84.103,81.077 6220.5@84.872,80.309
NetL3_1: 6217.7 L3.1 | length 4.5
  Top Layer w0.254: L3.1 81.026,82.677 81.438,83.089 82.377,83.089 83.283,83.994 6217.7@83.283,85.061
"NetMicroUSB B 2.0_2": "MicroUSB B 2.0.2" RD-.1 | length 3.7
  Top Layer w0.254: RD-.1 108.243,94.856 109.178,93.92 110.175,93.92
"NetMicroUSB B 2.0_3": "MicroUSB B 2.0.3" RD+.1 | length 4.2
  Top Layer w0.254: RD+.1 108.941,96.699 108.941,94.937 109.308,94.57 110.175,94.57
NetR9_2: R9.2
NetRLD3_1: RLD3.1 VCCLD.2 | length 1.3
  Top Layer w0.4: RLD3.1 VCCLD.2
SCL_I2C: ESP32.36 pad.2@93.701,87.96 pad.2@99.035,85.166 R6.2 | length 18.2
  Top Layer w0.3: v2(101.117,87.96) 101.702,88.544 106.05,88.544 ESP32.36
  Bottom Layer w0.3: pad.2@93.574,87.96 v2(101.117,87.96) 100.355,87.198 100.355,85.792 99.679,85.115 98.984,85.115 R6.2
SDA_I2C: ESP32.33 pad.2@93.701,86.563 pad.2@101.702,85.166 R5.2 | length 15.9
  Top Layer w0.3: v2(96.444,86.487) 97.866,85.065 v2(100.406,85.065) 105.929,85.065 ESP32.33
  Bottom Layer w0.3: pad.2@93.574,86.563 93.65,86.487 v2(96.444,86.487) ; v2(100.406,85.065) 101.6,85.065 101.702,85.166 101.702,83.935 R5.2
pads on no net: 10114830.0 "MicroUSB B 2.0.4" "MicroUSB B 2.0.6" ESP32.5 ESP32.7 ESP32.8 ESP32.9 ESP32.10 ESP32.11 ESP32.12 ESP32.13 ESP32.14 ESP32.19 ESP32.20 ESP32.21 ESP32.22 ESP32.27 ESP32.28 ESP32.29 ESP32.30 ESP32.31 ESP32.32 ESP32.37 F232BL.1 F232BL.2 F232BL.10 F232BL.11 F232BL.12 F232BL.14 F232BL.15 F232BL.16 F232BL.18 F232BL.19 F232BL.20 F232BL.21 F232BL.32 F232BL.33 FDFMA2P857.2
copper on no net: | length 23.5
  Top Layer w0.254: 89.777,72.771 89.777,74.377 92.997,77.597 105.767,77.597 106.173,77.191 ; 106.173,78.406 106.173,77.191 ; v5(107.696,76.505) 107.01,77.191 106.173,77.191
  Bottom Layer w0.4: 82.764,95.453 83.718,95.453

## Polygon pours and split planes (outlines as drawn)
GND on Bottom Layer "GND_DOWN" (solid, remove dead copper, pour order 8): 79.273,98.781 79.273,72.161 115.087,72.161 115.087,90.602 115.098,98.781 106.909,98.781 105.715,98.781 105.689,98.755 105.74,98.704 105.74,91.872 88.57,91.872 88.544,91.897 88.544,98.781
GND on Top Layer "GND_UP" (solid, remove dead copper, pour order 7): 79.273,98.781 79.273,72.161 115.087,72.161 115.087,90.602 115.087,98.781 106.909,98.781 105.715,98.781 105.689,98.755 105.74,98.704 105.74,91.872 88.57,91.872 88.544,91.897 88.544,98.781

## Silkscreen, mask and mechanical layers (free items; w line width, h text height)
Top Overlay:
  text "V-" at 79.731,93.421 h1.28
  text "V+" at 86.335,93.37 h1.28
  text "5V" at 81.661,83.439 h1.28 r270
  text "1.8V" at 81.763,79.451 h1.28 r270
  text "0T" at 114.198,77.445 h1.28 r270
  text "0R" at 114.198,75.997 h1.28 r270
  text "1T" at 111.887,74.879 h1.28 r270
  text "GPIO0" at 104.8,73.863 h1.28 r90
  text "1R" at 111.963,73.482 h1.28 r270
Bottom Overlay:
  drawing of 115 lines, arcs and shapes, not listed
  text "EMILIANO 5.00" at 112.649,86.665 h1.28
  text "09/07/17" at 111.912,85.471 h1.28
  text "P" at 109.372,77.292 h1.28
  text "D" at 109.372,76.028 h1.28
  text "G" at 109.372,74.778 h1.28
  text "GND" at 103.022,72.466 h1.28
Mechanical 1:
  lines w0.1: 105.124,92.281 89.173,92.276 cw(c89.173,92.548) 88.9,92.548 88.9,98.933 79.121,98.933 79.121,72.009 115.25,72.009 115.25,98.933 105.359,98.933 105.359,92.575 ; 105.124,92.295 ccw(c105.105,92.558) 105.368,92.575